# Altium PCB M2RB.PcbDoc (part 1 of 2)
Units mil, origin at the board's own origin, x right, y up, seen from the top; angles counter-clockwise.
Board outline 4750 x 3250 mil, 6 copper layers (Top Layer, Layer 1, Layer 2, Layer 3, Layer 4, Bottom Layer), stack 62.874 mil thick; 218 components, 161 nets, 1048 pads, 77 vias.
Unrouted connection lines stored in the file: 530.
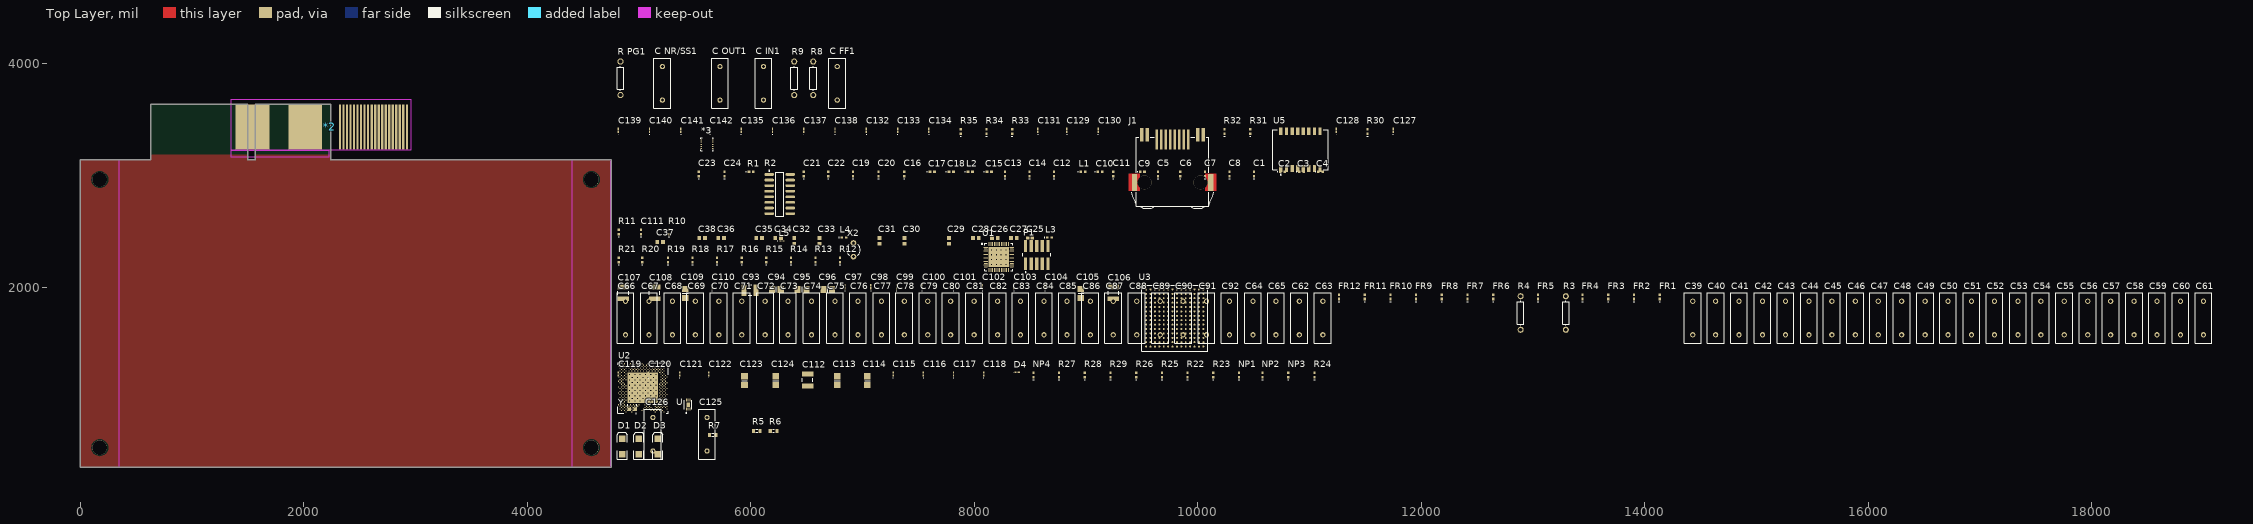
[diagram p0: Top Layer view]
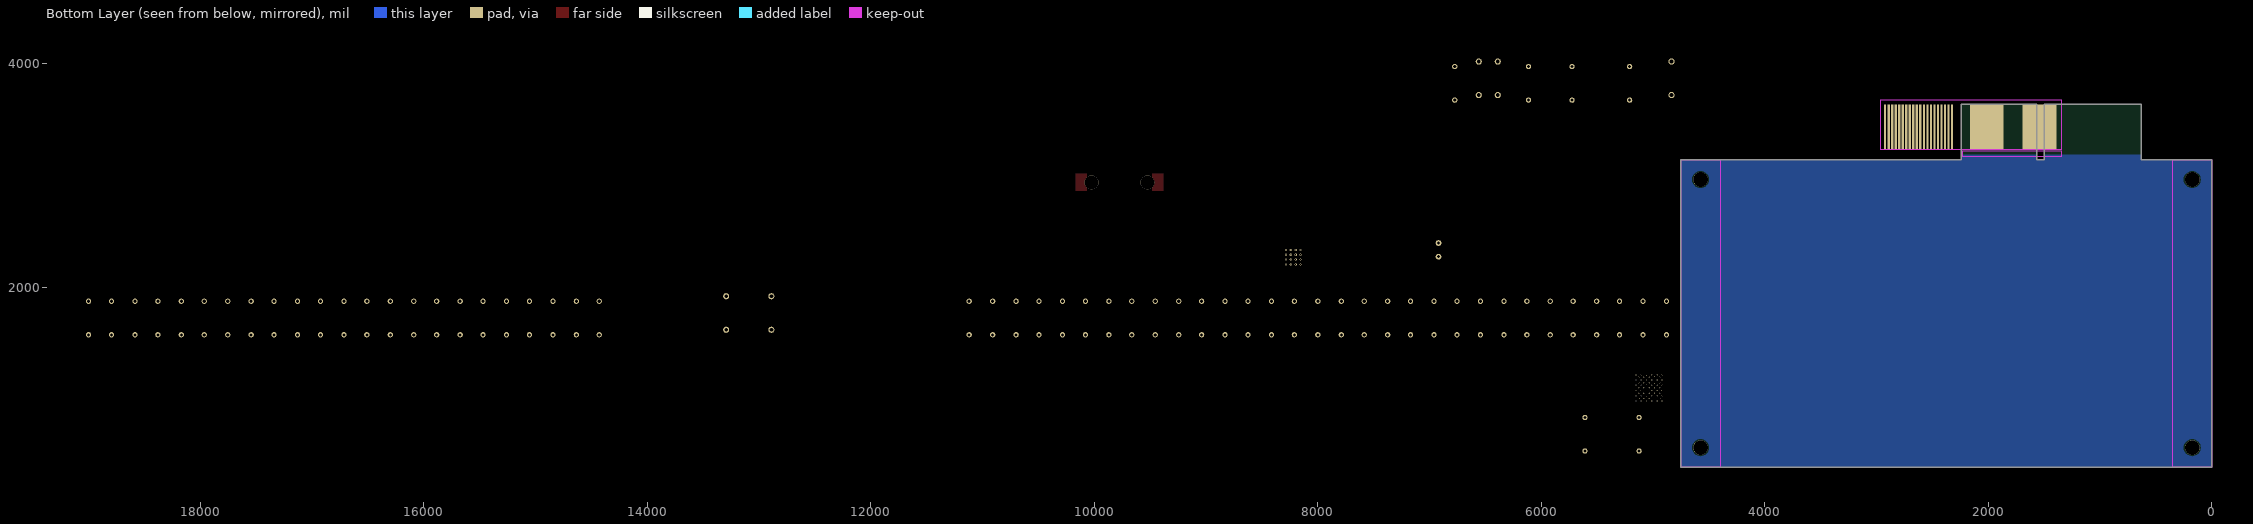
[diagram p1: Bottom Layer view, seen from below]
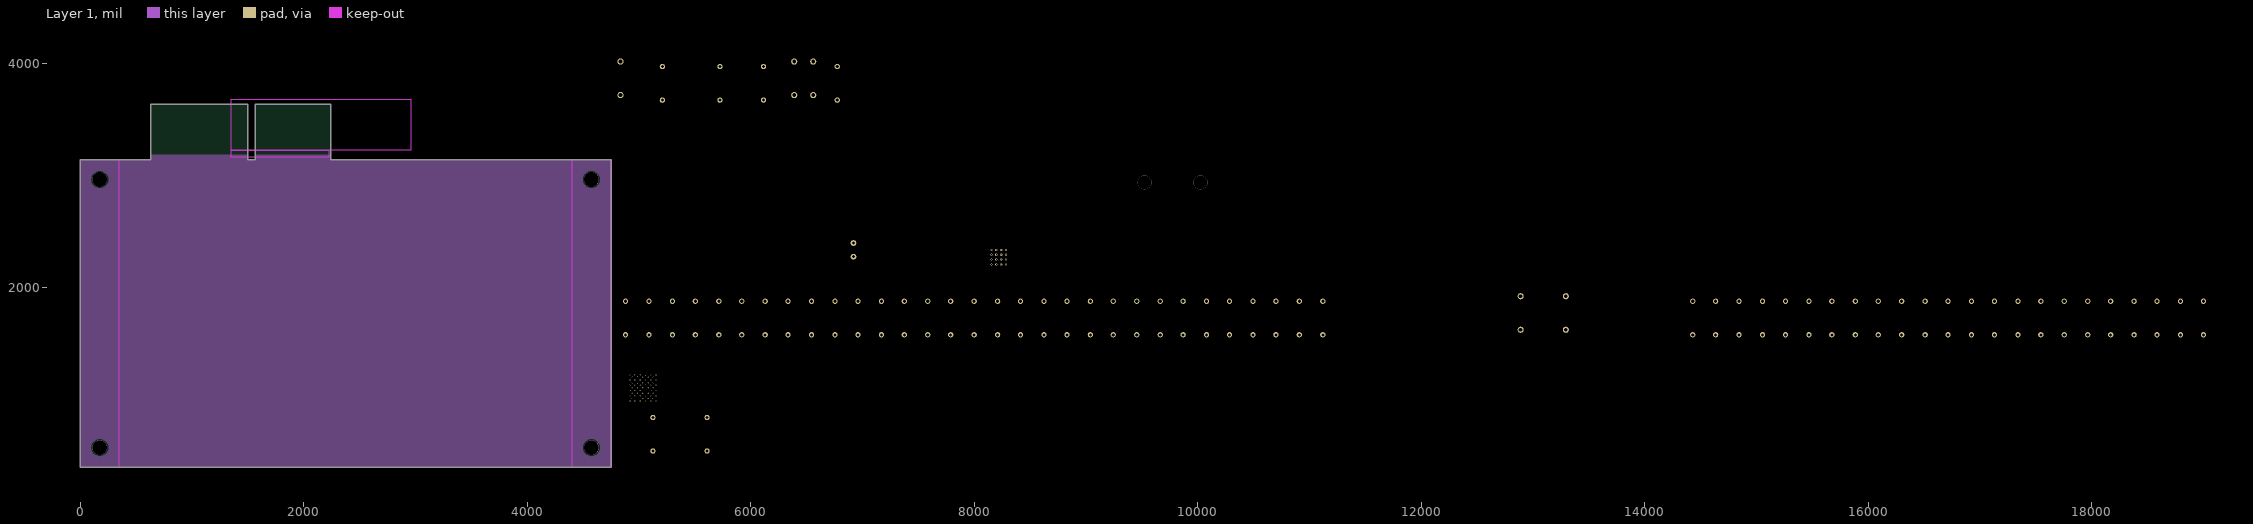
[diagram p2: Layer 1]
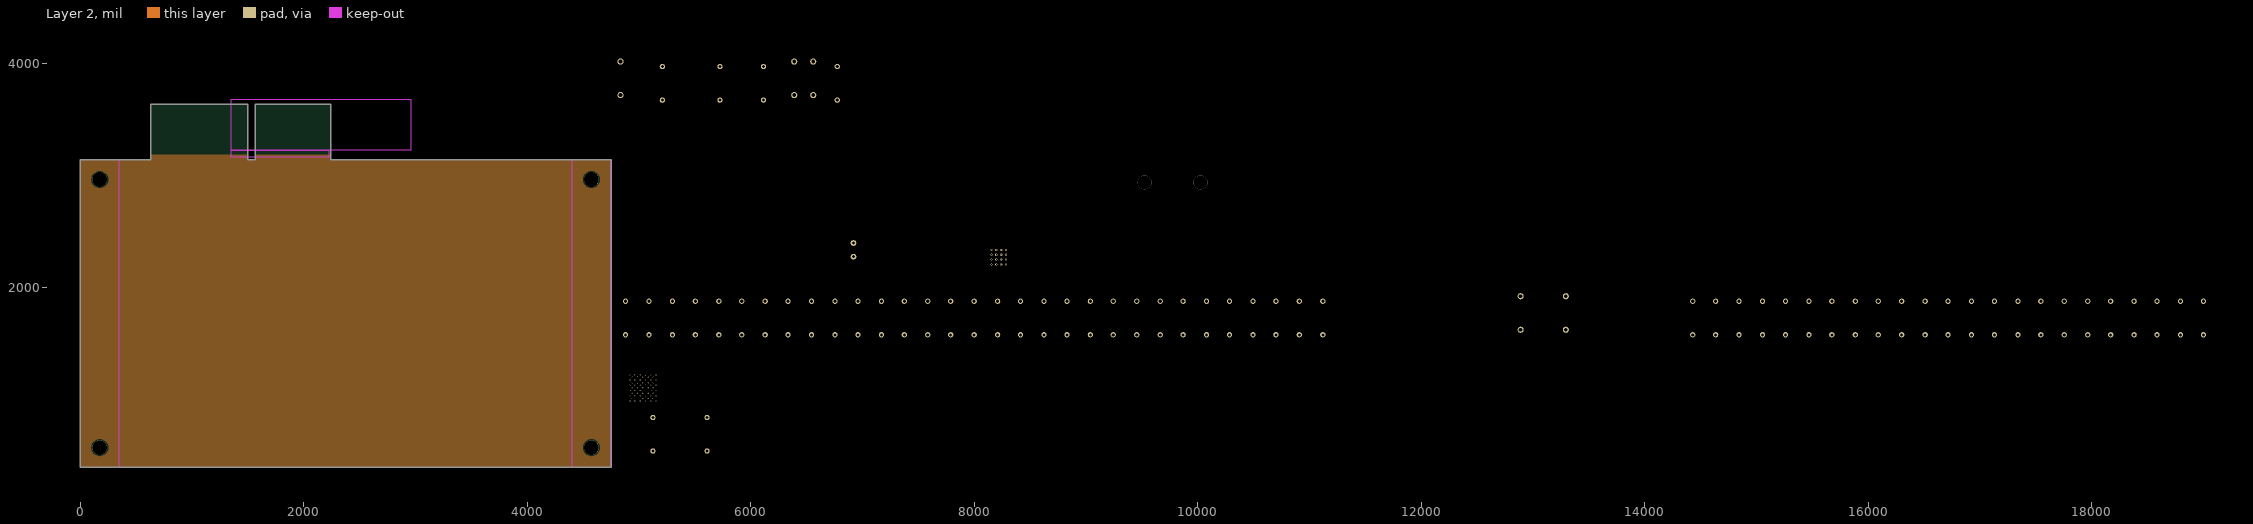
[diagram p3: Layer 2]
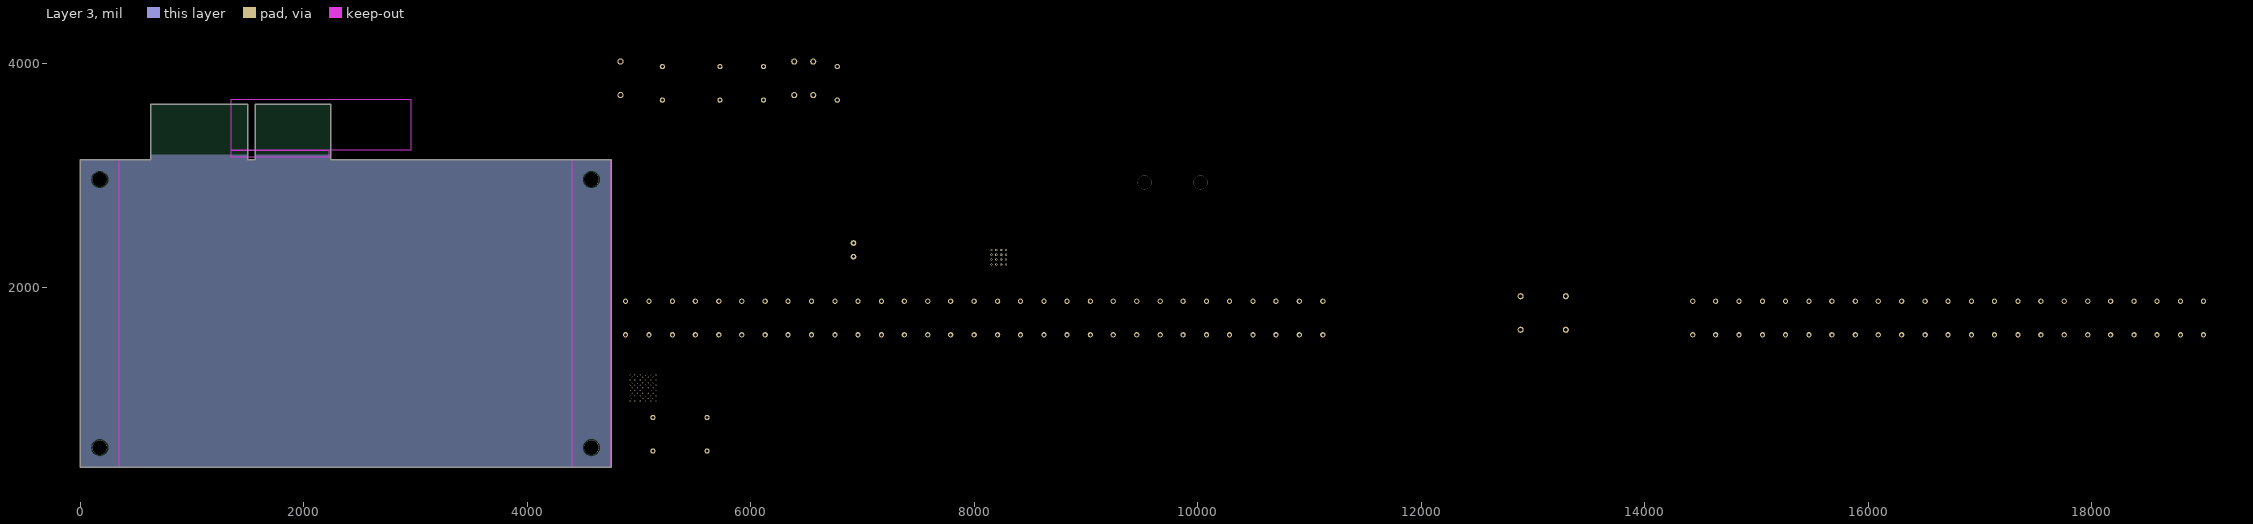
[diagram p4: Layer 3]
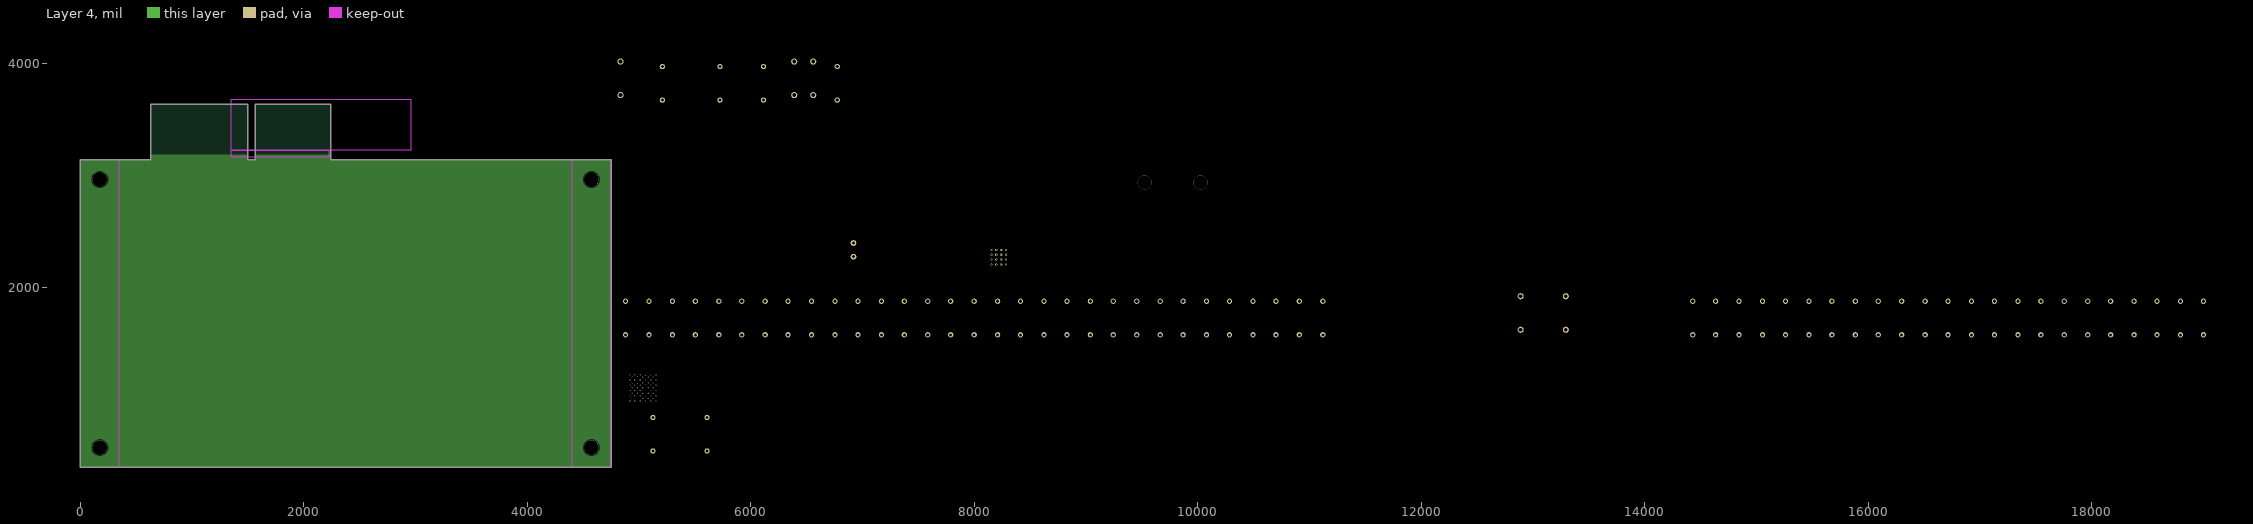
[diagram p5: Layer 4]

## Layer stack, top to bottom
Top Solder: solder mask 0.4, Solder Resist, Dk 3.5
Top Layer: signal copper 1.378
Dielectric 2: prepreg 3.937, PP-006, Dk 3.65
Layer 1: signal copper 0.689
Dielectric 4: core 22.2441, Core-009, Dk 4.5
Layer 2: signal copper 0.689
Dielectric 1: dielectric 5, FR-4, Dk 3.68
Layer 3: signal copper 0.689
Dielectric 5: core 22.2441, Core-009, Dk 4.5
Layer 4: signal copper 0.689
Dielectric 3: prepreg 3.937, PP-006, Dk 3.65
Bottom Layer: signal copper 1.378
Bottom Solder: solder mask 0.4, Solder Resist, Dk 3.5

## Board outline
0.5,389.5 0.5,3139.5 633.87,3139.5 633.87,3639.5 1498.87,3639.5 1498.87,3139.5 1568.87,3139.5 1568.87,3639.5 2243.86,3639.5 2243.86,3139.5 4750.5,3139.5 4750.5,389.5
cut-out: 2230,76045

## Design rules (kind name [scope] priority, off if disabled: settings)
Clearance [All] p1: gap=10 ignorepadtopadclearanceinfootprint=FALSE except(0: Arc-Hole Track-Hole SMDPad-Hole THPad-Hole Via-Hole Fill-Hole Poly-Hole Region-Hole Text-Hole)
PolygonConnect [All] p1: connectstyle=Relief reliefconductorwidth=10 reliefentries=4 polygonreliefangle="90 Angle" airgapwidth=10
RoomDefinition Designator_14 [InComponentClass('Designator')] p1: confinementstyle=ConfineIn formatcopy=TRUE lockcomponents=FALSE outline 0,0 2000,0 2000,1000 0,1000
RoomDefinition Designator_13 [InComponentClass('Designator')] p2: confinementstyle=ConfineIn formatcopy=TRUE lockcomponents=FALSE outline 0,0 2000,0 2000,1000 0,1000
RoomDefinition Designator_12 [InComponentClass('Designator')] p3: confinementstyle=ConfineIn formatcopy=TRUE lockcomponents=FALSE outline 0,0 2000,0 2000,1000 0,1000
RoomDefinition Designator_11 [InComponentClass('Designator')] p4: confinementstyle=ConfineIn formatcopy=TRUE lockcomponents=FALSE outline 0,0 2000,0 2000,1000 0,1000
RoomDefinition Designator_4 [InComponentClass('Designator')] p5: confinementstyle=ConfineIn formatcopy=TRUE lockcomponents=FALSE outline 0,0 2000,0 2000,1000 0,1000
RoomDefinition Designator_3 [InComponentClass('Designator')] p6: confinementstyle=ConfineIn formatcopy=TRUE lockcomponents=FALSE outline 0,0 2000,0 2000,1000 0,1000
RoomDefinition Designator_2 [InComponentClass('Designator')] p7: confinementstyle=ConfineIn formatcopy=TRUE lockcomponents=FALSE outline 0,0 2000,0 2000,1000 0,1000
RoomDefinition Designator_1 [InComponentClass('Designator')] p8: confinementstyle=ConfineIn formatcopy=TRUE lockcomponents=FALSE outline 0,0 2000,0 2000,1000 0,1000
RoomDefinition Ethernet [InComponentClass('Ethernet')] p9: confinementstyle=ConfineIn formatcopy=TRUE lockcomponents=FALSE outline 4795,2690 11975,2690 11975,3540 4795,3540
RoomDefinition TPS7A9101DSKT [InComponentClass('TPS7A9101DSKT')] p10: confinementstyle=ConfineIn formatcopy=TRUE lockcomponents=FALSE outline 4800,3175 4965,3175 4965,3400 4800,3400
RoomDefinition Designator [InComponentClass('Designator')] p11: confinementstyle=ConfineIn formatcopy=TRUE lockcomponents=FALSE outline 5510,684.68 11180,684.68 11180,3434.68 5510,3434.68
RoutingVias [All] p1: holewidth=28 width=50 viastyle="Through Hole" minholewidth=28 minwidth=50 maxholewidth=28 maxwidth=50
SolderMaskExpansion [All] p1: expansion=4 istentingtop=FALSE
Width [All] p1: maxlimit=10 minlimit=5 preferedwidth=10 toplayer_prefwidth=5 midlayer1_minwidth=10 midlayer2_minwidth=10 midlayer3_minwidth=10 midlayer4_minwidth=10 bottomlayer_prefwidth=5 minimp=50.000000 maximp=50.000000 favimp=50.000000
30 further rules are at their usual default settings.

## Classes and differential pairs
net class N000-1_[11..0]: N000-1_0 N000-1_1 N000-1_2 N000-1_3 N000-1_4 N000-1_5 N000-1_6 N000-1_7 N000-1_8 N000-1_9 N000-1_10 N000-1_11
component class Ethernet: C127 C128 C129 C130 C131 C132 C133 C134 C135 C136 C137 C138 C139 C140 C141 C142 J1 R30 R31 R32 R33 R34 R35 U5 U6 X3
component class TPS7A9101DSKT: *3 "C FF1" "C IN1" "C NR/SS1" "C OUT1" R8 R9 "R PG1"
component class Designator: C26 C27 C28 C29 C30 C31 C32 C33 C34 C35 C36 C37 C38 L4 L5 P1 U2 X2

## Components (designator, comment, footprint, x,y, rotation, side; value= is the part's Value field where it differs from the comment)
*2 "HSEC8-120-01-L-PV-4-1" "HSEC8-120-01-L-PV-4-1 Gold Fingers" 2170.5,3451.93 r0 top
*3 "TPS7A9101DSKT" TPS7A9101DSKT 5610,3279.68 r0 top
C1 "Cap" 0402-A 10505,3014.68 r90 top value=10uF
C2 "Cap" 0402-A 10760,3034.68 r0 top value=1000pF
C3 "Cap" 0402-A 10930,3034.68 r0 top value=100pF
C4 "Cap" 0402-A 11100,3034.68 r0 top value=DNP
C5 "Cap" 0402-A 9645,3014.68 r90 top value=100pF
C6 "Cap" 0402-A 9845,3014.68 r90 top value=1000pF
C7 "Cap" 0402-A 10065,3014.68 r90 top value=10nF
C8 "Cap" 0402-A 10285,3014.68 r90 top value=10uF
C9 "Cap" 0402-A 9505,3034.68 r0 top value="2.2 pF"
C10 "Cap" 0402-A 9125,3034.68 r0 top value=100pF
C11 "Cap" 0402-A 9245,3014.68 r90 top value=18pF
C12 "Cap" 0402-A 8715,3014.68 r90 top value=100pF
C13 "Cap" 0402-A 8275,3014.68 r90 top value=12pF
C14 "Cap" 0402-A 8495,3014.68 r90 top value=5.6pF
C15 "Cap" 0402-A 8135,3034.68 r0 top value=4.7pF
C16 "Cap" 0402-A 7375,3014.68 r90 top value=10uF
C17 "Cap" 0402-A 7625,3034.68 r0 top value=1000pF
C18 "Cap" 0402-A 7795,3034.68 r0 top value=100pF
C19 "Cap" 0402-A 6915,3014.68 r90 top value=100pF
C20 "Cap" 0402-A 7145,3014.68 r90 top value=1000pF
C21 "Cap" 0402-A 6475,3014.68 r90 top value=DNP
C22 "Cap" 0402-A 6695,3014.68 r90 top value=DNP
C23 "Cap" 0402-A 5535,3014.68 r90 top value=DNP
C24 "Cap" 0402-A 5765,3014.68 r90 top value=DNP
C25 "0.8pF" CAPC1005X60X30ML05T10 8500,2439.68 r0 top
C26 "12pF" CAPC1608X90X35LL15T15 8185,2439.68 r0 top
C27 "12pF" CAPC1608X90X35LL15T15 8355,2439.68 r0 top
C28 "100nF" CAPC1608X90X35LL15T15 8015,2439.68 r0 top
C29 "12pF" CAPC1608X90X35LL15T15 7775,2414.68 r90 top
C30 "1uF" CAPC1608X90X35LL15T15 7375,2414.68 r90 top
C31 "12pF" CAPC1608X90X35LL15T15 7155,2414.68 r90 top
C32 "12pF" CAPC1608X90X35LL15T15 6390,2414.68 r90 top
C33 "12pF" CAPC1608X90X35LL15T15 6615,2414.68 r90 top
C34 "100nF" CAPC1608X90X35LL15T15 6245,2439.68 r0 top
C35 "100nF" CAPC1608X90X35LL15T15 6075,2439.68 r0 top
C36 "100pF" CAPC1608X90X35LL15T15 5735,2439.68 r0 top
C37 "NC" CAPC1608X90X35LL15T15 5190,2405 r0 top
C38 "4.7uF" CAPC1608X90X35LL15T15 5565,2439.68 r0 top
C39 "Cap" RAD-0.3 14430,1725 r90 top value=100pF
C40 "Cap" RAD-0.3 14635,1725 r90 top value=100pF
C41 "Cap" RAD-0.3 14845,1725 r90 top value=100pF
C42 "Cap" RAD-0.3 15055,1725 r90 top value=100pF
C43 "Cap" RAD-0.3 15260,1725 r90 top value=100pF
C44 "Cap" RAD-0.3 15470,1725 r90 top value=100pF
C45 "Cap" RAD-0.3 15675,1725 r90 top value=100pF
C46 "Cap" RAD-0.3 15885,1725 r90 top value=100pF
C47 "Cap" RAD-0.3 16090,1725 r90 top value=100pF
C48 "Cap" RAD-0.3 16300,1725 r90 top value=100pF
C49 "Cap" RAD-0.3 16510,1725 r90 top value=100pF
C50 "Cap" RAD-0.3 16715,1725 r90 top value=100pF
C51 "Cap" RAD-0.3 16925,1725 r90 top value=100pF
C52 "Cap" RAD-0.3 17130,1725 r90 top value=100pF
C53 "Cap" RAD-0.3 17340,1725 r90 top value=100pF
C54 "Cap" RAD-0.3 17545,1725 r90 top value=100pF
C55 "Cap" RAD-0.3 17755,1725 r90 top value=100pF
C56 "Cap" RAD-0.3 17965,1725 r90 top value=100pF
C57 "Cap" RAD-0.3 18170,1725 r90 top value=100pF
C58 "Cap" RAD-0.3 18380,1725 r90 top value=100pF
C59 "Cap" RAD-0.3 18585,1725 r90 top value=100pF
C60 "Cap" RAD-0.3 18795,1725 r90 top value=100pF
C61 "Cap" RAD-0.3 19000,1725 r90 top value=100pF
C62 "Cap" RAD-0.3 10910,1725 r90 top value=100pF
C63 "Cap" RAD-0.3 11120,1725 r90 top value=100pF
C64 "Cap" RAD-0.3 10495,1725 r90 top value=100pF
C65 "Cap" RAD-0.3 10700,1725 r90 top value=100pF
C66 "Cap" RAD-0.3 4880,1725 r90 top value=100pF
C67 "Cap" RAD-0.3 5090,1725 r90 top value=100pF
C68 "Cap" RAD-0.3 5300,1725 r90 top value=100pF
C69 "Cap" RAD-0.3 5505,1725 r90 top value=100pF
C70 "Cap" RAD-0.3 5715,1725 r90 top value=100pF
C71 "Cap" RAD-0.3 5920,1725 r90 top value=100pF
C72 "Cap" RAD-0.3 6130,1725 r90 top value=100pF
C73 "Cap" RAD-0.3 6335,1725 r90 top value=100pF
C74 "Cap" RAD-0.3 6545,1725 r90 top value=100pF
C75 "Cap" RAD-0.3 6755,1725 r90 top value=100pF
C76 "Cap" RAD-0.3 6960,1725 r90 top value=100pF
C77 "Cap" RAD-0.3 7170,1725 r90 top value=100pF
C78 "Cap" RAD-0.3 7375,1725 r90 top value=100pF
C79 "Cap" RAD-0.3 7585,1725 r90 top value=100pF
C80 "Cap" RAD-0.3 7790,1725 r90 top value=100pF
C81 "Cap" RAD-0.3 8000,1725 r90 top value=100pF
C82 "Cap" RAD-0.3 8210,1725 r90 top value=100pF
C83 "Cap" RAD-0.3 8415,1725 r90 top value=100pF
C84 "Cap" RAD-0.3 8625,1725 r90 top value=100pF
C85 "Cap" RAD-0.3 8830,1725 r90 top value=100pF
C86 "Cap" RAD-0.3 9040,1725 r90 top value=100pF
C87 "Cap" RAD-0.3 9245,1725 r90 top value=100pF
C88 "Cap" RAD-0.3 9455,1725 r90 top value=100pF
C89 "Cap" RAD-0.3 9665,1725 r90 top value=100pF
C90 "Cap" RAD-0.3 9870,1725 r90 top value=100pF
C91 "Cap" RAD-0.3 10080,1725 r90 top value=100pF
C92 "Cap" RAD-0.3 10285,1725 r90 top value=100pF
C93 "Cap" 14-1210 5995,1975 r0 top value=100uF
C94 "Cap" 6-0805_M 6230,1980 r0 top value=4.7uF
C95 "Cap" 6-0805_M 6460,1980 r0 top value=4.7uF
C96 "Cap" 6-0805_M 6690,1980 r0 top value=4.7uF
C97 "Cap" 0603 6845,2005 r90 top value=470nF
C98 "Cap" 0603 7075,2005 r90 top value=470nF
C99 "Cap" 0603 7305,2005 r90 top value=470nF
C100 "Cap" 0603 7535,2005 r90 top value=470nF
C101 "Cap" 0603 7815,2005 r90 top value=470nF
C102 "Cap" 0603 8075,2005 r90 top value=470nF
C103 "Cap" 0603 8355,2005 r90 top value=470nF
C104 "Cap" 0603 8635,2005 r90 top value=470nF
C105 "Cap" 6-0805_M 8955,1945 r90 top value=4.7uF
C106 "Cap" 14-1210 9245,1950 r90 top value=47uF
C107 "Cap" 14-1210 4860,1950 r90 top value=100uF
C108 "Cap" 14-1210 5140,1950 r90 top value=47uF
C109 "Cap" 6-0805_M 5415,1945 r90 top value=4.7uF
C110 "Cap" 0603 5655,2005 r90 top value=470nF
C111 "Cap" 0402-A 5020,2495 r90 top value=100nF
C112 "Cap" 14-1210 6510,1170 r90 top value=100uF
C113 "Cap" 6-0805_M 6775,1165 r90 top value=4.7uF
C114 "Cap" 6-0805_M 7045,1165 r90 top value=4.7uF
C115 "Cap" 0603 7275,1225 r90 top value=470nF
C116 "Cap" 0603 7545,1225 r90 top value=470nF
C117 "Cap" 0603 7815,1225 r90 top value=470nF
C118 "Cap" 0603 8085,1225 r90 top value=470nF
C119 "Cap" 0603 4815,1225 r90 top value=470nF
C120 "Cap" 0603 5085,1225 r90 top value=470nF
C121 "Cap" 0603 5365,1225 r90 top value=470nF
C122 "Cap" 0603 5625,1225 r90 top value=470nF
C123 "Cap" 6-0805_M 5945,1165 r90 top value=4.7uF
C124 "Cap" 6-0805_M 6225,1165 r90 top value=4.7uF
C125 "Cap" RAD-0.3 5610,685 r90 top value=100nF
C126 "Cap" RAD-0.3 5125,685 r90 top value=100nF
C127 "Cap" 0603 11750,3405 r90 top value=30pF
C128 "Cap" 0603 11240,3405 r90 top value=30pF
C129 "Cap" 0603 8830,3405 r90 top value=1uF
C130 "Cap" 0603 9110,3405 r90 top value=100nF
C131 "Cap" 0603 8570,3405 r90 top value=10nF
C132 "Cap" 0603 7035,3405 r90 top value=1uF
C133 "Cap" 0603 7315,3405 r90 top value=100nF
C134 "Cap" 0603 7595,3405 r90 top value=1nF
C135 "Cap" 0603 5915,3405 r90 top value=10uF
C136 "Cap" 0603 6195,3405 r90 top value=1uF
C137 "Cap" 0603 6475,3405 r90 top value=100nf
C138 "Cap" 0603 6755,3405 r90 top value=10nF
C139 "Cap" 0603 4815,3405 r90 top value=10uF
C140 "Cap" 0603 5095,3405 r90 top value=1uF
C141 "Cap" 0603 5375,3405 r90 top value=100nf
C142 "Cap" 0603 5635,3405 r90 top value=10nF
"C FF1" "Cap" RAD-0.3 6775,3825 r90 top value=10nF
"C IN1" "Cap" RAD-0.3 6115,3825 r90 top value=10uF
"C NR/SS1" "Cap" RAD-0.3 5210,3825 r90 top value=0.1uF
"C OUT1" "Cap" RAD-0.3 5725,3825 r90 top value="10 pF"
D1 "LED2" 3.2X1.6X1.1 4850,575 r90 top
D2 "LED2" 3.2X1.6X1.1 5000,575 r90 top
D3 "LED2" 3.2X1.6X1.1 5170,575 r90 top
D4 "LED0" 0603 8385,1240 r0 top
FR1 "600R, 0.27A" 0402-A 14135,1915 r90 top value=600R@100MHz
FR2 "600R, 0.27A" 0402-A 13905,1915 r90 top value=600R@100MHz
FR3 "600R, 0.27A" 0402-A 13675,1915 r90 top value=600R@100MHz
FR4 "600R, 0.27A" 0402-A 13445,1915 r90 top value=600R@100MHz
FR5 "600R, 0.27A" 0402-A 13045,1915 r90 top value=600R@100MHz
FR6 "600R, 0.27A" 0402-A 12645,1915 r90 top value=600R@100MHz
FR7 "600R, 0.27A" 0402-A 12415,1915 r90 top value=600R@100MHz
FR8 "600R, 0.27A" 0402-A 12185,1915 r90 top value=600R@100MHz
FR9 "600R, 0.27A" 0402-A 11955,1915 r90 top value=600R@100MHz
FR10 "600R, 0.27A" 0402-A 11725,1915 r90 top value=600R@100MHz
FR11 "600R, 0.27A" 0402-A 11495,1915 r90 top value=600R@100MHz
FR12 "600R, 0.27A" 0402-A 11265,1915 r90 top value=600R@100MHz
J1 "634008137521" 634008137521 9775,3035 r0 top
L1 "1.8nH" 0402-A 8975,3034.68 r0 top
L2 "Inductor" 0402-A 7965,3034.68 r0 top value=1nH
L3 "3.9nH" 0402-A 8675,2444.68 r0 top
L4 "15nH" 0402-A 6835,2444.68 r0 top
L5 "10uH" 0603 6280,2415 r0 top
NP1 "Res1" 0402-A 10370,1215 r90 top value=500
NP2 "Res1" 0402-A 10580,1215 r90 top value=500
NP3 "Res1" 0402-A 10810,1215 r90 top value=500
NP4 "Res1" 0402-A 8530,1215 r90 top value=1k
P1 "SWD" SMTC-FTSH-105-01-L-DV-K_V 8560,2290 r0 top
R1 "Res Pack1" 0402-A 6005,3034.68 r0 top value=0W
R2 "Res Pack1" SOIC16_N 6260,2834.68 r0 top value=0W
R3 "Res1" AXIAL-0.3 13295,1770 r90 top value=1K
R4 "Res1" AXIAL-0.3 12890,1770 r90 top value=1K
R5 "Res3" J1-0603 6055,714.68 r0 top value=1K
R6 "Res3" J1-0603 6205,714.68 r0 top value=1K
R7 "Res3" J1-0603 5660,680 r0 top value=1K
R8 "Res1" AXIAL-0.3 6560,3870 r90 top value="11.8 K"
R9 "Res1" AXIAL-0.3 6390,3870 r90 top value="5.463 K"
R10 "Res1" 0402-A 5270,2495 r90 top value="2.2 K"
R11 "Res1" 0402-A 4820,2495 r90 top value="2.2 K"
R12 "Res1" 0402-A 6800,2245 r90 top value=50
R13 "Res1" 0402-A 6580,2245 r90 top value=50
R14 "Res1" 0402-A 6360,2245 r90 top value=50
R15 "Res1" 0402-A 6140,2245 r90 top value=50
R16 "Res1" 0402-A 5920,2245 r90 top value=10k
R17 "Res1" 0402-A 5700,2245 r90 top value=10k
R18 "Res1" 0402-A 5480,2245 r90 top value=10k
R19 "Res1" 0402-A 5260,2245 r90 top value=10k
R20 "Res1" 0402-A 5030,2245 r90 top value=10k
R21 "Res1" 0402-A 4820,2245 r90 top value=10k
R22 "Res1" 0402-A 9910,1215 r90 top value=500
R23 "Res1" 0402-A 10140,1215 r90 top value=500
R24 "Res1" 0402-A 11045,1215 r90 top value=500
R25 "Res1" 0402-A 9680,1215 r90 top value=4.7K
R26 "Res1" 0402-A 9450,1215 r90 top value=1k
R27 "Res1" 0402-A 8760,1215 r90 top value=330
R28 "Res1" 0402-A 8990,1215 r90 top value=4.7K
R29 "Res1" 0402-A 9220,1215 r90 top value=4.7K
R30 "Res1" 0402-A 11520,3395 r90 top value=50
R31 "Res1" 0402-A 10470,3395 r90 top value=6.49k
R32 "Res1" 0402-A 10240,3395 r90 top value=75
R33 "Res1" 0402-A 8340,3395 r90 top value=75
R34 "Res1" 0402-A 8110,3395 r90 top value=75
R35 "Res1" 0402-A 7880,3395 r90 top value=75
"R PG1" "Res1" AXIAL-0.3 4835,3870 r90 top value="20 K"
U "PL133-27GC-R" SON40P130X200X60-7N 5440,950 r90 top
U1 "NRF52832-QFAA-R" NRSC-QF-48_M 8220,2270 r0 top
U2 "LMS7002M" LM-QFN-261_V 5035,1100 r0 top
U3 "XC7S25-1FTGB196C" "FTGB196 Package" 9795,1725 r0 top
U5 "HX1188FNL" PULS-HX1188FNL-SMT-16_V 10920,3230 r0 top
X2 "FC-135 32.7680KA-AC" R38 6920,2335 r0 top
Y "ECS-TXO-2520-33-400-AN-TR" OSC_ECS-TXO-2520-33-400-AN-TR 4940,945 r90 top

## Footprints (in the part's own frame and the unit in brackets; to place one, negate y for a bottom-side part, rotate by r counter-clockwise, add the part's x,y. Pads: shape width x height; smd on the part's side, far side on the other; paste and mask are expansions set on the pad)
3.2X1.6X1.1 [mm] "SMT LED; 2 Flat Leads"
  rect 1.5x1.5 smd: 1(-1.75,0) 2(1.75,0)
  silkscreen extent -2.9,-1.15 3.2,1.15
6-0805_M [mm] "Chip Resistor, Body 2.0x1.2mm, IPC Low Density"
  rect 1.4x1.5 smd: 1(-1,0) 2(1,0)
  silkscreen extent 0,-0.65 0,0.65, body extent -1.07,-0.7 1.07,0.7, height 0.7
14-1210 [mm] "Chip Resistor, Body 3.2x2.5mm, IPC High Density"
  rect 1.1x2.6 smd: 1(-1.35,0) 2(1.35,0)
  silkscreen extent -0.4,-1.2 0.4,1.2, body extent -1.68,-1.32 1.68,1.32, height 0.9
0402-A [mm] "Chip Inductor, Body 1.0x0.5mm, IPC High Density"
  rect 0.6x0.5 smd: 1(-0.5,0) 2(0.5,0)
  silkscreen extent -1.1,-0.15 -1.1,0.15, body extent -0.55,-0.3 0.55,0.3, height 0.55
0603 [mm] "Chip Inductor, Body 0.6x0.3mm, IPC High Density"
  rect 0.5x0.3 smd: 1(-0.35,0) 2(0.35,0)
  silkscreen extent -0.9,-0.05 -0.9,0.05, body extent -0.33,-0.18 0.33,0.18, height 0.55
634008137521 [mm] "Modular Jack Horizontal Shielded SMT with LED and EMI Panel Finger 8P8C Tab Up"
  rect 0.61x4.5 smd: 1(3.57,7.31) 2(2.55,7.31) 3(1.53,7.31) 4(0.51,7.31) 5(-0.51,7.31) 6(-1.53,7.31) 7(-2.55,7.31) 8(-3.57,7.31)
  rect 0.8x3.05 smd: 9(-6.98,8.35) 10(-5.71,8.35) 11(5.71,8.35) 12(6.98,8.35)
  round 3.2 hole 3.2 unplated: MH1(-6.35,-2.45) MH2(6.35,-2.45)
  rect 1.2x3.89 smd paste-403.566 mask-403.566: S1(-8.66,-2.45) S2(8.66,-2.45)
  Top Layer region: -9.905,-4.395 -9.905,-0.505 -7.415,-0.505 -7.415,-1.256 -7.415,-1.256 -7.81,-1.796 -7.95,-2.45 -7.81,-3.104 -7.415,-3.644 -7.415,-3.644 -7.415,-3.644 -7.415,-4.395
  Top Layer region: 9.905,-4.395 9.905,-0.505 7.415,-0.505 7.415,-1.256 7.415,-1.256 7.81,-1.796 7.95,-2.45 7.81,-3.104 7.415,-3.644 7.415,-3.644 7.415,-3.644 7.415,-4.395
  silkscreen extent -9.41,-8.35 9.41,7.85, body extent -9.8,-8.45 9.8,9.55, height 15.02
AXIAL-0.3 [mm] "Axial Device, Thru-Hole; 2 Leads; 0.3 in Pin Spacing"
  round 1.4 hole 0.85: 1(-3.81,0) 2(3.81,0)
  silkscreen extent -2.77,-0.76 2.77,0.76
CAPC1005X60X30ML05T10 [mm] "Chip Capacitor, 2-Leads, Body 1.00x0.50mm, IPC Low Density"
  rect 0.76x0.72 smd: 1(-0.48,0) 2(0.48,0)
  body extent -0.53,-0.28 0.53,0.27, height 0.6
CAPC1608X90X35LL15T15 [mm] "Chip Capacitor, 2-Leads, Body 1.60x0.81mm, IPC High Density"
  rect 0.85x0.9 smd: 1(-0.65,0) 2(0.65,0)
  body extent -0.88,-0.48 0.87,0.48, height 0.9
"FTGB196 Package" [mm] "BGA, 196-Leads, Body 15.00x15.00mmx1.50mm, Pitch 1.00mm"
  round 0.45 smd: A1(-6.5,6.5) A2(-5.5,6.5) A3(-4.5,6.5) A4(-3.5,6.5) A5(-2.5,6.5) A6(-1.5,6.5) A7(-0.5,6.5) A8(0.5,6.5) A9(1.5,6.5) A10(2.5,6.5) A11(3.5,6.5) A12(4.5,6.5) A13(5.5,6.5) A14(6.5,6.5) B1(-6.5,5.5) B2(-5.5,5.5) B3(-4.5,5.5) B4(-3.5,5.5) B5(-2.5,5.5) B6(-1.5,5.5) B7(-0.5,5.5) B8(0.5,5.5) B9(1.5,5.5) B10(2.5,5.5) B11(3.5,5.5) B12(4.5,5.5) B13(5.5,5.5) B14(6.5,5.5) C1(-6.5,4.5) C2(-5.5,4.5) C3(-4.5,4.5) C4(-3.5,4.5) C5(-2.5,4.5) C6(-1.5,4.5) C7(-0.5,4.5) C8(0.5,4.5) C9(1.5,4.5) C10(2.5,4.5) C11(3.5,4.5) C12(4.5,4.5) C13(5.5,4.5) C14(6.5,4.5) D1(-6.5,3.5) D2(-5.5,3.5) D3(-4.5,3.5) D4(-3.5,3.5) D5(-2.5,3.5) D6(-1.5,3.5) D7(-0.5,3.5) D8(0.5,3.5) D9(1.5,3.5) D10(2.5,3.5) D11(3.5,3.5) D12(4.5,3.5) D13(5.5,3.5) D14(6.5,3.5) E1(-6.5,2.5) E2(-5.5,2.5) E3(-4.5,2.5) E4(-3.5,2.5) E5(-2.5,2.5) E6(-1.5,2.5) E7(-0.5,2.5) E8(0.5,2.5) E9(1.5,2.5) E10(2.5,2.5) E11(3.5,2.5) E12(4.5,2.5) E13(5.5,2.5) E14(6.5,2.5) F1(-6.5,1.5) F2(-5.5,1.5) F3(-4.5,1.5) F4(-3.5,1.5) F5(-2.5,1.5) F6(-1.5,1.5) F7(-0.5,1.5) F8(0.5,1.5) F9(1.5,1.5) F10(2.5,1.5) F11(3.5,1.5) F12(4.5,1.5) F13(5.5,1.5) F14(6.5,1.5) G1(-6.5,0.5) G2(-5.5,0.5) G3(-4.5,0.5) G4(-3.5,0.5) G5(-2.5,0.5) G6(-1.5,0.5) G7(-0.5,0.5) G8(0.5,0.5) G9(1.5,0.5) G10(2.5,0.5) G11(3.5,0.5) G12(4.5,0.5) G13(5.5,0.5) G14(6.5,0.5) H1(-6.5,-0.5) H2(-5.5,-0.5) H3(-4.5,-0.5) H4(-3.5,-0.5) H5(-2.5,-0.5) H6(-1.5,-0.5) H7(-0.5,-0.5) H8(0.5,-0.5) H9(1.5,-0.5) H10(2.5,-0.5) H11(3.5,-0.5) H12(4.5,-0.5) H13(5.5,-0.5) H14(6.5,-0.5) J1(-6.5,-1.5) J2(-5.5,-1.5) J3(-4.5,-1.5) J4(-3.5,-1.5) J5(-2.5,-1.5) J6(-1.5,-1.5) J7(-0.5,-1.5) J8(0.5,-1.5) J9(1.5,-1.5) J10(2.5,-1.5) J11(3.5,-1.5) J12(4.5,-1.5) J13(5.5,-1.5) J14(6.5,-1.5) K1(-6.5,-2.5) K2(-5.5,-2.5) K3(-4.5,-2.5) K4(-3.5,-2.5) K5(-2.5,-2.5) K6(-1.5,-2.5) K7(-0.5,-2.5) K8(0.5,-2.5) K9(1.5,-2.5) K10(2.5,-2.5) K11(3.5,-2.5) K12(4.5,-2.5) K13(5.5,-2.5) K14(6.5,-2.5) L1(-6.5,-3.5) L2(-5.5,-3.5) L3(-4.5,-3.5) L4(-3.5,-3.5) L5(-2.5,-3.5) L6(-1.5,-3.5) L7(-0.5,-3.5) L8(0.5,-3.5) L9(1.5,-3.5) L10(2.5,-3.5) L11(3.5,-3.5) L12(4.5,-3.5) L13(5.5,-3.5) L14(6.5,-3.5) M1(-6.5,-4.5) M2(-5.5,-4.5) M3(-4.5,-4.5) M4(-3.5,-4.5) M5(-2.5,-4.5) M6(-1.5,-4.5) M7(-0.5,-4.5) M8(0.5,-4.5) M9(1.5,-4.5) M10(2.5,-4.5) M11(3.5,-4.5) M12(4.5,-4.5) M13(5.5,-4.5) M14(6.5,-4.5) N1(-6.5,-5.5) N2(-5.5,-5.5) N3(-4.5,-5.5) N4(-3.5,-5.5) N5(-2.5,-5.5) N6(-1.5,-5.5) N7(-0.5,-5.5) N8(0.5,-5.5) N9(1.5,-5.5) N10(2.5,-5.5) N11(3.5,-5.5) N12(4.5,-5.5) N13(5.5,-5.5) N14(6.5,-5.5) P1(-6.5,-6.5) P2(-5.5,-6.5) P3(-4.5,-6.5) P4(-3.5,-6.5) P5(-2.5,-6.5) P6(-1.5,-6.5) P7(-0.5,-6.5) P8(0.5,-6.5) P9(1.5,-6.5) P10(2.5,-6.5) P11(3.5,-6.5) P12(4.5,-6.5) P13(5.5,-6.5) P14(6.5,-6.5)
  silkscreen extent -8.27,-7.5 7.5,7.5, body extent -7.5,-7.5 7.5,7.5, height 1.5
"HSEC8-120-01-L-PV-4-1 Gold Fingers" [mil]
  rect 303x400 smd paste-400: 0(-629,-17.25) 1(-156,-17.25)
  rect 19.68x400 smd paste-400: 2(154.5,-17.25) 3(186,-17.25) 4(217.5,-17.25) 5(249,-17.25) 6(280.5,-17.25) 7(312,-17.25) 8(343.5,-17.25) 9(375,-17.25) 10(406.5,-17.25) 11(438,-17.25) 12(469.5,-17.25) 13(501,-17.25) 14(532.5,-17.25) 15(564,-17.25) 16(595.5,-17.25) 17(627,-17.25) 18(658.5,-17.25) 19(690,-17.25) 20(721.5,-17.25) 21(753,-17.25)
  rect 303x400 smd far side paste-400: 22(-629,-17.25) 23(-156,-17.25)
  rect 19.68x400 smd far side paste-400: 24(154.5,-17.25) 25(186,-17.25) 26(217.5,-17.25) 27(249,-17.25) 28(280.5,-17.25) 29(312,-17.25) 30(343.5,-17.25) 31(375,-17.25) 32(406.5,-17.25) 33(438,-17.25) 34(469.5,-17.25) 35(501,-17.25) 36(532.5,-17.25) 37(564,-17.25) 38(595.5,-17.25) 39(627,-17.25) 40(658.5,-17.25) 41(690,-17.25) 42(721.5,-17.25) 43(753,-17.25)
  Keep-Out Layer region: -825,-220 792.61,-220 792.61,225 -825,225
  Keep-Out Layer region: -825,-285 60,-285 60,-230 -825,-230
  Keep-Out Layer region: -820,220
J1-0603 [mm] "Chip Resistor, Body 1.6x0.8mm, IPC High Density"
  rect 0.7x0.9 smd: 1(-0.75,0) 2(0.75,0)
  silkscreen extent -0.2,-0.35 0.2,0.35, body extent -0.85,-0.48 0.85,0.48, height 0.9
LM-QFN-261_V [mm] "QFN, 261-Leads, Body 11.5x11.5mm, Pitch 0.666mm, Thermal Pad 6.989x6.989mm"
  round 0.27 smd: A5(-4.163,5.495) A7(-3.497,5.495) A9(-2.83,5.495) A13(-1.499,5.495) A17(-0.166,5.495) A21(1.165,5.495) AA1(-5.495,-1.165) AA3(-4.828,-1.165) AA5(-4.163,-1.165) AA29(3.829,-1.165) AA31(4.496,-1.165) AA33(5.162,-1.165) AB2(-5.162,-1.498) AB4(-4.496,-1.498) AB6(-3.83,-1.498) AB30(4.162,-1.498) AB32(4.828,-1.498) AB34(5.495,-1.498) AC3(-4.828,-1.832) AC5(-4.163,-1.832) AC29(3.829,-1.832) AC31(4.496,-1.832) AC33(5.162,-1.832) AD2(-5.162,-2.164) AD4(-4.496,-2.164) AD6(-3.83,-2.164) AD30(4.162,-2.164) AD32(4.828,-2.164) AE1(-5.495,-2.498) AE3(-4.828,-2.498) AE5(-4.163,-2.498) AE29(3.829,-2.498) AE31(4.496,-2.498) AE33(5.162,-2.498) AF2(-5.162,-2.83) AF4(-4.496,-2.83) AF6(-3.83,-2.83) AF30(4.162,-2.83) AF32(4.828,-2.83) AF34(5.495,-2.83) AG3(-4.828,-3.164) AG5(-4.163,-3.164) AG29(3.829,-3.164) AG31(4.496,-3.164) AG33(5.162,-3.164) AH2(-5.162,-3.497) AH4(-4.496,-3.497) AH30(4.162,-3.497) AH32(4.828,-3.497) AJ1(-5.495,-3.829) AJ3(-4.828,-3.829) AJ5(-4.163,-3.829) AJ7(-3.497,-3.829) AJ9(-2.83,-3.829) AJ11(-2.164,-3.829) AJ13(-1.499,-3.829) AJ15(-0.833,-3.829) AJ19(0.499,-3.829) AJ21(1.165,-3.829) AJ25(2.498,-3.829) AJ27(3.164,-3.829) AJ29(3.829,-3.829) AJ31(4.496,-3.829) AJ33(5.162,-3.829) AK2(-5.162,-4.162) AK4(-4.496,-4.162) AK6(-3.83,-4.162) AK8(-3.164,-4.162) AK10(-2.498,-4.162) AK12(-1.832,-4.162) AK14(-1.166,-4.162) AK20(0.832,-4.162) AK22(1.498,-4.162) AK26(2.83,-4.162) AK28(3.497,-4.162) AK30(4.162,-4.162) AK32(4.828,-4.162) AK34(5.495,-4.162) AL3(-4.828,-4.496) AL5(-4.163,-4.496) AL7(-3.497,-4.496) AL9(-2.83,-4.496) AL11(-2.164,-4.496) AL13(-1.499,-4.496) AL19(0.499,-4.496) AL21(1.165,-4.496) AL23(1.832,-4.496) AL27(3.164,-4.496) AL29(3.829,-4.496) AL31(4.496,-4.496) AL33(5.162,-4.496) AM2(-5.162,-4.828) AM4(-4.496,-4.828) AM6(-3.83,-4.828) AM8(-3.164,-4.828) AM10(-2.498,-4.828) AM12(-1.832,-4.828) AM18(0.166,-4.828) AM20(0.832,-4.828) AM22(1.498,-4.828) AM24(2.164,-4.828) AM26(2.83,-4.828) AM28(3.497,-4.828) AM30(4.162,-4.828) AM34(5.495,-4.828) AN3(-4.828,-5.162) AN5(-4.163,-5.162) AN7(-3.497,-5.162) AN9(-2.83,-5.162) AN11(-2.164,-5.162) AN17(-0.166,-5.162) AN23(1.832,-5.162) AN25(2.498,-5.162) AN27(3.164,-5.162) AN29(3.829,-5.162) AN31(4.496,-5.162) AP6(-3.83,-5.495) AP10(-2.498,-5.495) AP26(2.83,-5.495) AP30(4.162,-5.495) AP32(4.828,-5.495) B2(-5.162,5.162) B4(-4.496,5.162) B8(-3.164,5.162) B10(-2.498,5.162) B12(-1.832,5.162) B14(-1.166,5.162) B16(-0.5,5.162) B18(0.166,5.162) B20(0.832,5.162) B22(1.498,5.162) C1(-5.495,4.828) C3(-4.828,4.828) C5(-4.163,4.828) C7(-3.497,4.828) C9(-2.83,4.828) C11(-2.164,4.828) C13(-1.499,4.828) C15(-0.833,4.828) C17(-0.166,4.828) C19(0.499,4.828) C21(1.165,4.828) C23(1.832,4.828) C25(2.498,4.828) C27(3.164,4.828) C29(3.829,4.828) C31(4.496,4.828) D2(-5.162,4.496) D4(-4.496,4.496) D6(-3.83,4.496) D8(-3.164,4.496) D10(-2.498,4.496) D12(-1.832,4.496) D14(-1.166,4.496) D16(-0.5,4.496) D18(0.166,4.496) D20(0.832,4.496) D22(1.498,4.496) D24(2.164,4.496) D26(2.83,4.496) D28(3.497,4.496) D30(4.162,4.496) D32(4.828,4.496) E3(-4.828,4.163) E5(-4.163,4.163) E9(-2.83,4.163) E11(-2.164,4.163) E13(-1.499,4.163) E15(-0.833,4.163) E17(-0.166,4.163) E19(0.499,4.163) E21(1.165,4.163) E23(1.832,4.163) E25(2.498,4.163) E27(3.164,4.163) E29(3.829,4.163) E31(4.496,4.163) F2(-5.162,3.83) F4(-4.496,3.83) F6(-3.83,3.83) F8(-3.164,3.83) F10(-2.498,3.83) F12(-1.832,3.83) F14(-1.166,3.83) F16(-0.5,3.83) F18(0.166,3.83) F20(0.832,3.83) F22(1.498,3.83) F24(2.164,3.83) F26(2.83,3.83) F28(3.497,3.83) F30(4.162,3.83) F32(4.828,3.83) G1(-5.495,3.497) G3(-4.828,3.497) G5(-4.163,3.497) G29(3.829,3.497) G31(4.496,3.497) H2(-5.162,3.164) H6(-3.83,3.164) H30(4.162,3.164) H32(4.828,3.164) J1(-5.495,2.83) J3(-4.828,2.83) J5(-4.163,2.83) J31(4.496,2.83) J33(5.162,2.83) K2(-5.162,2.498) K4(-4.496,2.498) K6(-3.83,2.498) K30(4.162,2.498) K32(4.828,2.498) K34(5.495,2.498) L3(-4.828,2.164) L5(-4.163,2.164) L31(4.496,2.164) L33(5.162,2.164) M2(-5.162,1.832) M4(-4.496,1.832) M6(-3.83,1.832) M30(4.162,1.832) M32(4.828,1.832) N1(-5.495,1.499) N3(-4.828,1.499) N31(4.496,1.499) N33(5.162,1.499) P2(-5.162,1.166) P4(-4.496,1.166) P30(4.162,1.166) P32(4.828,1.166) P34(5.495,1.166) R3(-4.828,0.833) R5(-4.163,0.833) R29(3.829,0.833) R31(4.496,0.833) R33(5.162,0.833) T4(-4.496,0.5) T6(-3.83,0.5) T30(4.162,0.5) T32(4.828,0.5) U1(-5.495,0.166) U3(-4.828,0.166) U5(-4.163,0.166) U29(3.829,0.166) U31(4.496,0.166) U33(5.162,0.166) V2(-5.162,-0.166) V4(-4.496,-0.166) V6(-3.83,-0.166) V30(4.162,-0.166) V32(4.828,-0.166) V34(5.495,-0.166) W3(-4.828,-0.499) W29(3.829,-0.499) W31(4.496,-0.499) W33(5.162,-0.499) Y2(-5.162,-0.832) Y4(-4.496,-0.832) Y6(-3.83,-0.832) Y30(4.162,-0.832) Y32(4.828,-0.832)
  rect 6.989x6.989 smd: EP(0,0)
  silkscreen extent -5.75,-5.75 5.75,5.75, body extent -5.75,-5.75 5.75,5.75, height 0.85
NRSC-QF-48_M [mm] "QFN, 48-Leads, Body 6.00x6.00mm, Pitch 0.40mm, Thermal Pad 4.60x4.60mm, IPC Low Density"
  oval 0.95x0.2 smd: 1(-2.95,2.2) 2(-2.95,1.8) 3(-2.95,1.4) 4(-2.95,1) 5(-2.95,0.6) 6(-2.95,0.2) 7(-2.95,-0.2) 8(-2.95,-0.6) 9(-2.95,-1) 10(-2.95,-1.4) 11(-2.95,-1.8) 12(-2.95,-2.2) 25(2.95,-2.2) 26(2.95,-1.8) 27(2.95,-1.4) 28(2.95,-1) 29(2.95,-0.6) 30(2.95,-0.2) 31(2.95,0.2) 32(2.95,0.6) 33(2.95,1) 34(2.95,1.4) 35(2.95,1.8) 36(2.95,2.2)
  oval 0.2x0.95 smd: 13(-2.2,-2.95) 14(-1.8,-2.95) 15(-1.4,-2.95) 16(-1,-2.95) 17(-0.6,-2.95) 18(-0.2,-2.95) 19(0.2,-2.95) 20(0.6,-2.95) 21(1,-2.95) 22(1.4,-2.95) 23(1.8,-2.95) 24(2.2,-2.95) 37(2.2,2.95) 38(1.8,2.95) 39(1.4,2.95) 40(1,2.95) 41(0.6,2.95) 42(0.2,2.95) 43(-0.2,2.95) 44(-0.6,2.95) 45(-1,2.95) 46(-1.4,2.95) 47(-1.8,2.95) 48(-2.2,2.95)
  rect 4.6x4.6 smd: 49(0,0)
  silkscreen extent -3.92,-3.15 3.15,3.15, body extent -3,-3 3,3, height 0.9
OSC_ECS-TXO-2520-33-400-AN-TR [mm]
  rect 0.9x0.8 smd: 1(-0.925,-0.725) 2(0.925,-0.725) 3(0.925,0.725) 4(-0.925,0.725)
  silkscreen extent -2,-1 0.22,1
PULS-HX1188FNL-SMT-16_V [mm] "SMD, 16-Leads, Body 12.7x9.09mm, Pitch 1.27mm"
  rect 0.76x1.65 smd: 1(-4.445,-4.255) 2(-3.175,-4.255) 3(-1.905,-4.255) 4(-0.635,-4.255) 5(0.635,-4.255) 6(1.905,-4.255) 7(3.175,-4.255) 8(4.445,-4.255) 9(4.445,4.255) 10(3.175,4.255) 11(1.905,4.255) 12(0.635,4.255) 13(-0.635,4.255) 14(-1.905,4.255) 15(-3.175,4.255) 16(-4.445,4.255)
  silkscreen extent -6.35,-5.75 6.35,4.54, body extent -6.35,-4.54 6.35,4.54, height 5.99
R38 [mm] "Crystal, Thru-Hole; 2 Leads; Body 3.1 x 8.2 mm (Dia.xH)"
  round 1.3 hole 0.7: 1(0,1.55) 2(0,-1.55)
  silkscreen extent -1.55,-1.19 1.55,1.17
RAD-0.3 [mm] "Radial Cap, Thru-Hole; 2 Leads; 0.3 in Pin Spacing"
  round 1.2 hole 0.7: 1(-3.81,0) 2(3.81,0)
  silkscreen extent -5.71,-1.91 5.71,1.91
SMTC-FTSH-105-01-L-DV-K_V [mm] "CONN, 10-Leads, Body 6.35x3.43mm, Pitch 1.27mm"
  rect 0.74x2.79 smd: 1(-2.54,-2.035) 2(-2.54,2.035) 3(-1.27,-2.035) 4(-1.27,2.035) 5(0,-2.035) 6(0,2.035) 7(1.27,-2.035) 8(1.27,2.035) 9(2.54,-2.035) 10(2.54,2.035)
  silkscreen extent -3.17,-4.1 3.17,0.34, body extent -3.17,-2.92 3.18,2.92, height 6.12
SOIC16_N [mm] "SOIC, 16-Leads, Body 9.9x3.9mm, Pitch 1.27mm, IPC Medium Density"
  oval 2.2x0.6 smd: 1(-2.4,4.445) 2(-2.4,3.175) 3(-2.4,1.905) 4(-2.4,0.635) 5(-2.4,-0.635) 6(-2.4,-1.905) 7(-2.4,-3.175) 8(-2.4,-4.445) 9(2.4,-4.445) 10(2.4,-3.175) 11(2.4,-1.905) 12(2.4,-0.635) 13(2.4,0.635) 14(2.4,1.905) 15(2.4,3.175) 16(2.4,4.445)
  silkscreen extent -2.52,-5 0.9,5.42, body extent -2,-5 2,5, height 1.91
SON40P130X200X60-7N [mm]
  rrect25% 0.66x0.22 smd: 1(-1.02,0.4) 2(-1.02,0) 3(-1.02,-0.4) 4(1.02,-0.4) 5(1.02,0) 6(1.02,0.4)
  rect 1x0.8 smd paste-1: 7(0,0)
  silkscreen extent -1.98,-0.83 1.02,0.83
TPS7A9101DSKT [mm]
  rect 0.35x0.2 smd: 1(-1.3,1) 2(-1.3,0.5) 3(-1.3,0) 4(-1.3,-0.5) 5(-1.3,-1) 6(1.3,-1) 7(1.3,-0.5) 8(1.3,0) 9(1.3,0.5) 10(1.3,1)
  silkscreen extent -1.4,-1.52 1.4,1.52

## Part data
C1 C2 C3 C4 C5 C6 C7 C8 C9 C10 C11 C12 C13 C14 C15 C16 C17 C18 C19 C20 C21 C22 C23 C24 C39 C40 C41 C42 C43 C44 C45 C46 C47 C48 C49 C50 C51 C52 C53 C54 C55 C56 C57 C58 C59 C60 C61 C62 C63 C64 C65 C66 C67 C68 C69 C70 C71 C72 C73 C74 C75 C76 C77 C78 C79 C80 C81 C82 C83 C84 C85 C86 C87 C88 C89 C90 C91 C92 C111 C125 C126 C127 C128 C129 C135 C136 C137 C138 C139 C140 C141 C142 "C FF1" "C IN1" "C NR/SS1" "C OUT1": "Capacitor", LatestRevisionDate=17-Jul-2002, LatestRevisionNote="Re-released for DXP Platform.", PackageDescription="Radial Cap, Thru-Hole; 2 Leads; 0.3 in Pin Spacing", PackageReference=RAD-0.3, Published=8-Jun-2000, Publisher="Altium Limited"
C25: library part CMP-2008-02046-1, Manufacturer=Kemet, Part Number=C0402C104K8PACTU
C26 C27 C28 C29 C30 C31 C32 C33 C34 C35 C36 C37 C38: library part CMP-2006-04390-1, Manufacturer="AVX Interconnect / Elco", Part Number=06035C104KAT4A
C93 C107 C112: "Capacitor", Supplier Part Number 1=490-9969-1-ND, ComponentLink1Description="New link", LatestRevisionDate=17-Jul-2002, LatestRevisionNote="Re-released for DXP Platform.", PackageDescription="Radial Cap, Thru-Hole; 2 Leads; 0.3 in Pin Spacing", PackageReference=RAD-0.3, Published=8-Jun-2000, Publisher="Altium Limited", Supplier 1=Digi-Key
C94 C95 C96 C105 C109 C113 C114 C123 C124: "Capacitor", Supplier Part Number 1=490-14466-1-ND, LatestRevisionDate=17-Jul-2002, LatestRevisionNote="Re-released for DXP Platform.", PackageDescription="Radial Cap, Thru-Hole; 2 Leads; 0.3 in Pin Spacing", PackageReference=RAD-0.3, Published=8-Jun-2000, Publisher="Altium Limited", Supplier 1=Digi-Key
C97 C98 C99 C100 C101 C102 C103 C104 C110 C115 C116 C117 C118 C119 C120 C121 C122 C130 C131 C132 C133 C134: "Capacitor", Supplier Part Number 1=490-3295-1-ND, LatestRevisionDate=17-Jul-2002, LatestRevisionNote="Re-released for DXP Platform.", PackageDescription="Radial Cap, Thru-Hole; 2 Leads; 0.3 in Pin Spacing", PackageReference=RAD-0.3, Published=8-Jun-2000, Publisher="Altium Limited", Supplier 1=Digi-Key
C106 C108: "Capacitor", Supplier Part Number 1=490-4844-1-ND, LatestRevisionDate=17-Jul-2002, LatestRevisionNote="Re-released for DXP Platform.", PackageDescription="Radial Cap, Thru-Hole; 2 Leads; 0.3 in Pin Spacing", PackageReference=RAD-0.3, Published=8-Jun-2000, Publisher="Altium Limited", Supplier 1=Digi-Key
D1 D2 D3: "Typical RED, GREEN, YELLOW, AMBER GaAs LED", LatestRevisionDate=17-Jul-2002, LatestRevisionNote="Re-released for DXP Platform.", PackageDescription="SM LED; 2 Flat Leads", PackageReference=3.2X1.6X1.1, PackageVersion=Feb-2002, Published=8-Jun-2000, Publisher="Altium Limited"
D4: "Typical INFRARED GaAs LED", LatestRevisionDate=08-Jul-2005, LatestRevisionNote="Mech Layer 1 removed.", PackageDescription="LED; 2 Leads", PackageReference=LED-0, Published=8-Jun-2000, Publisher="Altium Limited"
FR1 FR2 FR3 FR4 FR5 FR6 FR7 FR8 FR9 FR10 FR11 FR12: library part Ferrite, Current Rating=270mA, DC Resistance (DCR)="750 mOhm Max", Impedance @ Frequency="600 Ohm @ 100MHz", Manufacturer="Taiyo Yuden", Manufacturer Part Number 1=BK0603TS601-T, Package / Case="0201 (0603 Metric)", Category=Filters, Filter Type="Differential Mode - Single", Height (Max)="0.013\" (0.33mm)", Mounting Type="Surface Mount", Packaging="Cut Tape (CT)", Part Description="FERRITE BEAD 600 OHM 0201 1LN", RoHS="RoHS Compliant", Size / Dimension="0.024\" L x 0.012\" W (0.60mm x 0.30mm)", Supplier 1=Digi-Key
J1: library part CMP-1502-01717-1, "Modular Jack WR-MJ, Tab Up, Shielded, with LED and EMI Panel Finger, Horizontal Entry, SMT, 8P8C", Contact Resistance=20mOhm, Manufacturer="Wurth Elektronik", Operating Temperature=-40to85degC, Rated Current=1.5A, Withstanding Voltage=1000VAC, Working Voltage=120VAC, Compliance=Leadfree/RoHS, Datasheet URL=https://katalog.we-online.de/em/datasheet/634008137521%283%29.pdf, Entrance=Horizontal, Manufacturer URL=http://www.we-online.de, Mounting Technology=SMT, Package Reference=634008137521, Packaging=TapeandReel, Part Number=634008137521, Pin Number=8P8C, Port=1x1, Publisher=WurthElektronik
L1 L3 L4 L5: library part Inductor, "Inductor", Code_IEC=1005, Code_JEITA=0402, LatestRevisionDate=29-May-2009, LatestRevisionNote="IPC-7351 Footprint Added.", PackageDescription="Chip Inductor", PackageReference=0402-A, Published=8-Jun-2000, Publisher="Altium Limited"
NP1 NP2 NP3 NP4 R3 R4 R5 R6 R7 R8 R9 R10 R11 R12 R13 R14 R15 R16 R17 R18 R19 R20 R21 R22 R23 R24 R25 R26 R27 R28 R29 R30 R31 R32 R33 R34 R35 "R PG1": "Resistor", Published=8-Jun-2000, Publisher="Altium Limited"
  NP1 NP2 NP3 NP4 R3 R4 R8 R9 R10 R11 R12 R13 R14 R15 R16 R17 R18 R19 R20 R21 R22 R23 R24 R25 R26 R27 R28 R29 R30 R31 R32 R33 R34 R35 "R PG1": LatestRevisionDate=17-Jul-2002, LatestRevisionNote="Re-released for DXP Platform.", PackageDescription="Axial Device, Thru-Hole; 2 Leads; 0.3 in Pin Spacing", PackageReference=AXIAL-0.3
  R5 R6 R7: LatestRevisionDate=29-May-2009, LatestRevisionNote="IPC-7351 Footprint Added.", PackageDescription="Chip Resistor", PackageReference=J1-0603
P1: library part CMP-2000-05353-1, "Male Header, Pitch 1.27 mm, 2 x 5 Position, Height 6.25 mm", Color=Black, Manufacturer=Samtec, Package Description="Male Header, Pitch 1.27 mm, 2 x 5 Position, Height 5.97 mm, Tail Length 4.32 mm", Package Reference=FTSH-105-01-L-DV-K, Standard Package=1, Category=Connectors,Interconnects, Connector Type=Header,Unshrouded, Contact Finish=Gold, Contact Finish Thickness=10µin(0.25µm), Contact Mating Length="0.120\"(3.05mm)", Contact Type=MalePin, Datasheet URL=http://suddendocs.samtec.com/prints/ftsh-1xx-xx-xxx-dv-xxx-mkt.pdf, Datasheet Version="Rev. ET, 10/1995", Family=RectangularConnectors-Headers,MalePins, Manufacturer URL=http://www.samtec.com/, Mating Products="SFMC-105-L2-S-D-TR-ND / -CONN.05\"SURFACE10POSSMT / FLE-105-01-G-DV-TR-ND / -CONNSKT1.27MM10POSDUALSMD / FLE-105-01-G-DV-A-P-ND / -CONNSKT1.27MM10POSDUALSMD / FLE-105-01-G-DV-A-ND / -CONNSKT1.27MM10POSDUALSMD / CLP-105-02-G-D-P-TR-ND / -CONNRCPT10POSDUAL.05\"SMD / SAM1155-05-ND / -CONNRCPT10POSDUAL.05\"SMD / SAM1154-05-ND / -CONNRCPT10POSDUAL.05\"SMD / SAM1153-05-ND / -CONNRCPT10POSDUAL.05\"SMD / SAM1226-05-ND / -CONNRCPT.05\"10POSDUALSMD", Mounting Type=SurfaceMount, Number of Positions=10, Number of Positions Loaded=All, Number of Rows=2, Other Names=Q3937619, Package URL=http://suddendocs.samtec.com/prints/ftsh-1xx-xx-xxx-dv-xxx-footprint.pdf, Packaging=Tube, Pitch="0.050\"(1.27mm)", Product Training Modules=Board-to-BoardConnectors, Row Spacing="0.050\"(1.27mm)", Series=FTSH, Termination=Solder
R1 R2: "Isolated Resistor Network - Parts", Code_IPC=SOIC127P600-16, Code_JEDEC=MS-012-AC, LatestRevisionDate=29-May-2009, LatestRevisionNote="IPC-7351 Footprint Added.", PackageDescription="16-Pin Small Outline Integrated Circuit 1.27 mm Pitch", PackageReference=SOIC16, Published=24-Mar-1999, Publisher="Altium Limited", Sim Note="Enter the Resistance value into parameter field."
U: "Clock Fanout Buffer _Distribution_ IC 1:2 150MHz 6-UFDFN Exposed Pad", Package="UFDFN-6 Microchip", Availability=Unavailable, MF=Microchip, MP=PL133-27GC-R, Price=None, SnapEDA_Link=https://www.snapeda.com/parts/PL133-27GC-R/Microchip/view-part/524694/?ref=snap
U1: library part CMP-2100-03661-1, "Multiprotocol Bluetooth Smart, ANT/ANT+ and Proprietary System-on-Chip, 2.4 GHz, 256 KB FLASH, 1.7 to 3.6 V, -40 to 85 degC, 48-Pin QFN, RoHS, Tape and Reel", Frequency=2.4GHz, Manufacturer="Nordic Semiconductor", Max Operating Temperature=85degC, Min Operating Temperature=-40degC, Package Description="48-Pin Quad Flat No-lead Package, Body 6 x 6 mm, Pitch 0.4 mm, Thermal Pad 4.6 x 4.6 mm", Package Reference=QF-48, Datasheet URL=http://infocenter.nordicsemi.com/pdf/nRF52832_PS_v1.0.pdf, Datasheet Version="Rev. 1.0, 02/2016", Lead Free=LeadFree, Manufacturer URL=http://www.nordicsemi.com/eng/Products/, Max Frequency=2.4GHz, Mount=SurfaceMount, Packaging=TapeandReel, RoHSCompliant=true
U2: library part CMP-2000-06561-1, "FPRF MIMO Transceiver IC with Integrated Microcontroller, 1.1 to 1.89 V, -40 to 85 degC, 261-Pin QFN, RoHS", Current - Receiving=420mA, Current - Transmitting=350mA, Frequency=100kHz~3.8GHz, Manufacturer=LimeMicrosystemsLtd, Operating Temperature=-40°C~85°C, Package / Case=261-SMDModule, Package Description="261-Pin Quad Flat No-lead Package, Body 11.5 x 11.5 mm, Pitch 0.666 mm", Package Reference=QFN-261, Power - Output=0dBm, Voltage - Supply=1.1V~1.89V, Category=RF/IFandRFID, Data Rate (Max)=-, Datasheet URL=http://www.richardsonrfpd.com/resources/RellDocuments/SYS_31/LMS7002M.pdf, Datasheet Version="Rev. 2.8.0, 09/2015", Family=RFTransceiverICs, GPIO=-, Manufacturer URL=http://www.limemicro.com/, Memory Size=10kBSRAM, Modulation=-, Mounting Technology=SurfaceMount, Package URL=http://cdn.limemicro.com/wp-content/uploads/2015/08/LMS7002M-PCB-Layout-Recommendations-1.0r5.pdf, Packaging=Tray, Protocol=CDMA,GSM,HSPA,LTE,TD-SCDMA,WCDMA, RF Family/Standard=Cellular, Sensitivity=-, Serial Interfaces=SPI, Series=-, Type=TxRx+MCU
U5: library part CMP-2000-06431-1, "Telecom Transformer 1:1/1:1, -40 to 85 degC, 16-Pin SMT, RoHS, Tube", Manufacturer="Pulse Electronics", Package Description="16-Pin Surface Mount Device, Body 12.7 x 9.09 mm, Pitch 1.27 mm", Package Reference=SMT, Standard Package=40, Category=Transformers, Datasheet URL=http://productfinder.pulseeng.com/products/datasheets/HX1188FNL.pdf;jsessionid=D0CB5525A348FF42F5E5BE320CB10324, Datasheet Version="Rev. B, 05/2014", Family=PulseTransformers, Height - Seated (Max)=5.99mm, Manufacturer URL=http://www.pulseelectronics.com/, Mounting Technology=SurfaceMount, Mounting Type=SurfaceMount, Online Catalog=HX1188, Other Names=553-2200, Other Related Documents=PackagesFNLvs.NL, PartNumber=HX1188FNL, Size / Dimension=12.70mmLx9.00mmW, Transformer Type=IsolationandDataInterface(Encapsulated), Turns Ratio - Primary=Secondary:1:1Transmitter,1:1Receiver
X2: library part XTAL, "32.768kHz Crystal Oscillator", Supplier Part Number 1=FC-13532.7680KA-AC-ND, LatestRevisionDate=17-Jul-2002, LatestRevisionNote="Re-released for DXP Platform.", PackageDescription="Crystal, Thru-Hole; 2 Leads; Body 3.1 x 8.2 mm (Dia.xH)", PackageReference=R38, Published=8-Jun-2000, Publisher="Altium Limited", Supplier 1=Digi-Key
Y: "40MHz TCXO HCMOS Oscillator 3.3V Enable/Disable 4-SMD, No Lead", Package="SMD-4 ECS International", Availability=Unavailable, MF="ECS Inc.", MP=ECS-TXO-2520-33-400-AN-TR, Price=None, SnapEDA_Link=https://www.snapeda.com/parts/ECS-TXO-2520-33-400-AN-TR/ECS%20Inc./view-part/699443/?ref=snap
*2: Supplier 1=Mouser
L2: Code_IEC=1005, Code_JEITA=0402, LatestRevisionDate=29-May-2009, LatestRevisionNote="IPC-7351 Footprint Added.", PackageDescription="Chip Inductor", PackageReference=0402-A, Published=8-Jun-2000, Publisher="Altium Limited"
U3: Supplier 1=Digi-Key

## Free pads (board coordinates)
  round 130 hole 130 unplated: 5(175.5,2964.5) 6(175.5,564.5) 7(4575.5,564.5) 8(4575.5,2964.5)

## Via types
v1: diameter 11.81, hole 7.87, Top Layer to Bottom Layer, 61 vias
v2: diameter 19.68, hole 7.87, Top Layer to Bottom Layer, 16 vias

## Nets (pads, with @x,y where several pads share a name; then routed paths per layer and width w, separated by ;. In a path a pad name is that pad's centre, name@x,y a point inside that pad or via, vN(x,y) a via of type N, cw(c..) or ccw(c..) an arc to the next point about the centre after c; other vN are vias at no path point)
1V0: C93.2 C94.2 C95.2 C96.2 C97.2 C98.2 C99.2 C100.2 C101.2 C107.2 C108.2 C109.2 C110.2 U3.D6 U3.D8 U3.E5 U3.E7 U3.E9 U3.F6 U3.G5 U3.G9 U3.H6 U3.J5 U3.J9 U3.K6 U3.K8
1V8: *2.0 C62.2 C63.2 C102.2 C103.2 C104.2 C105.2 C106.2 C111.1 C112.2 C113.2 C114.2 C115.2 C116.2 C117.2 C118.2 C119.2 C120.2 C121.2 C122.2 C123.2 C124.2 C125.2 C126.2 C139.1 C140.1 C141.1 C142.1 FR1.1 FR2.1 FR3.1 FR4.1 FR7.1 FR8.1 FR9.1 FR10.1 FR11.1 FR12.1 NP2.2 NP3.2 NP4.2 R3.1 R4.1 R7.2 R10.2 R11.1 R16.1 R17.2 R18.2 R19.2 R21.2 R24.2 R25.2 R27.2 R28.2 R29.2 U2.W31 U3.F8 U3.F10 U3.G13 U3.H10 U3.K10 U3.K13 U3.L9 U3.N6 U3.N8 U3.N13 U.5 U.6 Y.1 Y.4
3V3: *2.23 C34.2 C35.2 C38.2 C135.2 C136.2 C137.2 C138.2 P1.1 R6.1 U1.13 U1.36 U1.48
5V0: *2.1 R5.1
DCC: L5.1 U1.47
DEC2: C37.2 U1.32
DEC3: C36.2 U1.33
DIQ10: U2.AG31
DIQ11: U2.AF30
DIQ12: U2.AF34
DIQ13: U2.AE31
DIQ14: U2.AD30
DIQ15: U2.AC29
DIQ16: U2.AE33
DIQ17: U2.AD32
DIQ18: U2.AC31
DIQ19: U2.AC33
DIQ110: U2.AB30
DIQ111: U2.AB32
GND: "C IN1.1" "C NR/SS1.1" "C OUT1.2" *2.22 *3.4 C1.1 C2.1 C3.1 C4.1 C5.1 C6.1 C7.1 C8.1 C9.1 C13.1 C14.1 C15.1 C16.1 C17.1 C18.1 C19.1 C20.1 C21.1 C22.2 C23.1 C24.1 C25.2 C26.1 C27.1 C28.2 C29.2 C30.2 C31.1 C32.1 C33.1 C34.1 C35.1 C36.1 C37.1 C38.1 C39.2 C40.2 C41.2 C42.2 C43.2 C44.2 C45.2 C46.2 C47.2 C48.2 C49.2 C50.2 C51.2 C52.2 C53.2 C54.2 C55.2 C56.2 C57.2 C58.2 C59.2 C60.2 C61.2 C62.1 C63.1 C64.1 C65.1 C66.1 C67.1 C68.1 C69.1 C70.1 C71.1 C72.1 C73.1 C74.1 C75.1 C76.1 C77.1 C78.1 C79.1 C80.1 C81.1 C82.1 C83.1 C84.1 C85.1 C86.1 C87.1 C88.1 C89.1 C90.1 C91.1 C92.1 C93.1 C94.1 C95.1 C96.1 C97.1 C98.1 C99.1 C100.1 C101.1 C102.1 C103.1 C104.1 C105.1 C106.1 C107.1 C108.1 C109.1 C110.1 C111.2 C112.1 C113.1 C114.1 C115.1 C116.1 C117.1 C118.1 C119.1 C120.1 C121.1 C122.1 C123.1 C124.1 C125.1 C126.1 C127.1 C128.2 C129.2 C130.2 C131.2 C132.2 C133.2 C134.2 C135.1 C136.1 C137.1 C138.1 C139.2 C140.2 C141.2 C142.2 D1.2 D2.2 D3.2 D4.2 J1.S1 J1.S2 NP1.2 P1.3 P1.5 P1.7 P1.9 R8.2 R20.1 R22.2 R23.2 R26.2 R31.1 U1.31 U1.45 U1.49 U2.AA31 U2.AF32 U2.AG29 U2.AJ7 U2.AJ9 U2.AJ19 U2.AK12 U2.AK20 U2.AL13 U2.AL23 U2.AM22 U2.AN25 U2.B18 U2.B20 U2.C7 U2.C23 U2.D20 U2.E25 U2.EP U2.F6 U2.G31 U2.H2 U2.J33 U2.K4 U2.L3 U2.N3 U2.R33 U2.T30 U2.U31 U2.V30 U2.W29 U2.Y30 U3.A1 U3.A6 U3.A9 U3.A11 U3.A14 U3.B4 U3.B7 U3.B8 U3.B9 U3.C2 U3.C6 U3.C7 U3.C8 U3.C9 U3.C13 U3.D5 U3.D7 U3.D9 U3.D11 U3.E1 U3.E3 U3.E6 U3.E8 U3.E10 U3.E14 U3.F5 U3.F7 U3.F9 U3.G3 U3.G6 U3.G7 U3.G10 U3.G12 U3.H5 U3.H8 U3.H9 U3.J6 U3.J10 U3.K1 U3.K5 U3.K7 U3.K9 U3.K14 U3.L4 U3.L6 U3.L8 U3.L10 U3.L11 U3.N3 U3.N5 U3.N7 U3.N9 U3.N12 U3.P1 U3.P14 U.3 U.7 Y.2
  other v1: 4916.89,981.89 4964.13,981.89 5011.38,981.89 5058.62,981.89 5105.87,981.89 5153.11,981.89 4940.51,1005.51 4987.76,1005.51 5035,1005.51 5082.24,1005.51 5129.49,1005.51 4916.89,1029.13 4964.13,1029.13 5011.38,1029.13 5058.62,1029.13 5105.87,1029.13 5153.11,1029.13 4940.51,1052.76 4987.76,1052.76 5035,1052.76 5082.24,1052.76 5129.49,1052.76 4916.89,1076.38 4964.13,1076.38 5011.38,1076.38 5058.62,1076.38 5105.87,1076.38 5153.11,1076.38 4940.51,1100 4987.76,1100 5035,1100 5082.24,1100 5129.49,1100 4916.89,1123.62 4964.13,1123.62 5011.38,1123.62 5058.62,1123.62 5105.87,1123.62 5153.11,1123.62 4940.51,1147.24 4987.76,1147.24 5035,1147.24 5082.24,1147.24 5129.49,1147.24 4916.89,1170.87 4964.13,1170.87 5011.38,1170.87 5058.62,1170.87 5105.87,1170.87 5153.11,1170.87 4940.51,1194.49 4987.76,1194.49 5035,1194.49 5082.24,1194.49 5129.49,1194.49 4916.89,1218.11 4964.13,1218.11 5011.38,1218.11 5058.62,1218.11 5105.87,1218.11 5153.11,1218.11
  other v2: 8155.04,2205.04 8198.35,2205.04 8241.65,2205.04 8284.96,2205.04 8155.04,2248.35 8198.35,2248.35 8241.65,2248.35 8284.96,2248.35 8155.04,2291.65 8198.35,2291.65 8241.65,2291.65 8284.96,2291.65 8155.04,2334.96 8198.35,2334.96 8241.65,2334.96 8284.96,2334.96
Net*1_2: C11.2
Net*1_4: C15.2 L2.2
Net*1_5: C21.2
Net*1_6: C22.1 R2.16
Net*1_7: C19.2 C20.2
Net*1_9: C5.2 C6.2 C7.2 C8.2 C12.1 C13.2 C14.2
Net*1_15: C1.2 C2.2 C3.2 C4.2
Net*3_1: "C FF1.1" "C OUT1.1" *3.1 R9.1
Net*3_3: "C FF1.2" *3.3 R8.1 R9.2
Net*3_5: "R PG1.2" *3.5
Net*3_6: "C IN1.2" *3.6 *3.7 *3.9 *3.10
Net*3_8: "C NR/SS1.2" *3.8
NetC9_2: C9.2 C11.1 L1.2
NetC10_1: C10.1
NetC10_2: C10.2 L1.1
NetC12_2: C12.2
NetC16_2: C16.2 C17.2 C18.2 L2.1
NetC23_2: C23.2 R1.1
NetC24_2: C24.2 R2.1
NetC25_1: C25.1 L3.1 U1.30
NetC28_1: C28.1 U1.1
NetC29_1: C29.1 U1.37
NetC30_1: C30.1 L4.2 U1.46
NetC31_2: C31.2 U1.38
NetC39_1: C39.1 U2.AD4
NetC40_1: C40.1 U2.C21
NetC41_1: C41.1 U2.AF2
NetC42_1: C42.1 U2.AF6
NetC43_1: C43.1 U2.C25
NetC44_1: C44.1 U2.AD6
NetC45_1: C45.1 U2.AG5
NetC46_1: C46.1 U2.AP26
NetC47_1: C47.1 U2.G5
NetC48_1: C48.1 U2.AN23
NetC49_1: C49.1 U2.J5 U2.K6
NetC50_1: C50.1 U2.B16
NetC51_1: C51.1 U2.D6 U2.F8
NetC52_1: C52.1 U2.P4
NetC53_1: C53.1 U2.F24
NetC54_1: C54.1 U2.AN17
NetC55_1: C55.1 U2.AM20
NetC56_1: C56.1 U2.K2 U2.L5
NetC57_1: C57.1 U2.E19
NetC58_1: C58.1 U2.AL19
NetC59_1: C59.1 U2.J3
NetC60_1: C60.1 U2.F20
NetC61_1: C61.1 U2.AJ25
NetC64_2: C64.2 FR5.1 R3.2
NetC65_2: C65.2 FR6.1 R4.2
NetC66_2: C66.2 FR1.2 U2.G3
NetC67_2: C67.2 FR2.2 U2.AK22
NetC68_2: C68.2 FR3.2 U2.E21
NetC69_2: C69.2 FR4.2 U2.AM18
NetC70_2: C70.2 FR5.2 U2.H6
NetC71_2: C71.2 FR6.2 U2.AM26
NetC72_2: C72.2 FR7.2 U2.N1
NetC73_2: C73.2 FR8.2 U2.AF4
NetC74_2: C74.2 FR9.2 U2.E17
NetC75_2: C75.2 FR10.2 U2.D24
NetC76_2: C76.2 FR11.2 U2.D16
NetC77_2: C77.2 FR12.2 U2.AE3
NetC78_2: C78.2 U2.M4
NetC79_2: C79.2 U2.AL21
NetC80_2: C80.2 U2.A17
NetC81_2: C81.2 U2.L33
NetC82_2: C82.2 U2.R31
NetC83_2: C83.2 U2.AA29
NetC84_2: C84.2 U2.AE29
NetC85_2: C85.2 C86.2 U2.H32
NetC87_2: C87.2 C88.2 U2.W33
NetC89_2: C89.2 C90.2 U2.AH30
NetC91_2: C91.2 C92.2 U2.T32
NetC128_1: C128.1 R30.2
NetC129_1: C129.1 C130.1 U5.2
NetC131_1: C131.1 R33.2 R34.2
NetC132_1: C132.1 C133.1 U5.7
NetC134_1: C134.1 R32.1 R35.1
NetD1_1: D1.1 R5.2
NetD2_1: D2.1 R6.2
NetD3_1: D3.1 R7.1
NetD4_1: D4.1 R27.1 U3.P9
NetJ1_1: J1.1 U5.9
NetJ1_2: J1.2 U5.11
NetJ1_3: J1.3 U5.14
NetJ1_4: J1.4 J1.5 R34.1
NetJ1_6: J1.6 U5.16
NetJ1_7: J1.7 J1.8 R33.1
NetL4_1: L4.1 L5.2
NetNP1_1: NP1.1 R24.1 U3.M7
NetNP2_1: NP2.1 R22.1 U3.M9
NetNP3_1: NP3.1 R23.1 U3.M8
NetNP4_1: NP4.1 R26.1 U3.B10
NetR10_1: R10.1 U2.D26
NetR11_2: R11.2 U2.C27
NetR12_1: R12.1 U2.D28
NetR12_2: R12.2
NetR13_1: R13.1 U2.C29
NetR13_2: R13.2
NetR14_1: R14.1 U2.F28
NetR14_2: R14.2 U3.B12
NetR15_1: R15.1 U2.F30
NetR15_2: R15.2 U3.B11
NetR16_2: R16.2 U2.V32
NetR17_1: R17.1 U2.E27
NetR18_1: R18.1 U2.U29
NetR19_1: R19.1 U2.V34
NetR20_2: R20.2 U2.F18
NetR21_1: R21.1 U2.U33
NetR25_1: R25.1 U3.C11
NetR28_1: R28.1 U3.P8
NetR29_1: R29.1 U3.L7
NetR31_2: R31.2
NetR32_2: R32.2 U5.15
NetR35_2: R35.2 U5.10
NetU2_A7: U2.A7
NetU2_AA33: U2.AA33
NetU2_AB34: U2.AB34
NetU2_AM24: U2.AM24 U.2
NetU2_AN9: U2.AN9
NetU2_AP10: U2.AP10
NetU2_B8: U2.B8
NetU2_E5: U2.E5 U.4
NetU2_Y32: U2.Y32
NetU3_A8: U3.A8
NetU6_1: 
NetU6_5: 
NetU_1: U.1 Y.3
nRESET: P1.10 U1.24
RDN: U5.1
RDP: U5.3
SDWIO: P1.2 U1.26
SWDCLK: P1.4 U1.25
SWO: P1.6 U1.21
TDN: U5.6
TDP: U5.8
XC1: C27.2 U1.34
XC2: C26.2 U1.35
XI: C127.2
XL1: C33.2 U1.2 X2.1
XL2: C32.2 U1.3 X2.2
XO: R30.1